# EAGLE board STM32LoRa (EAGLE 9.6.2)
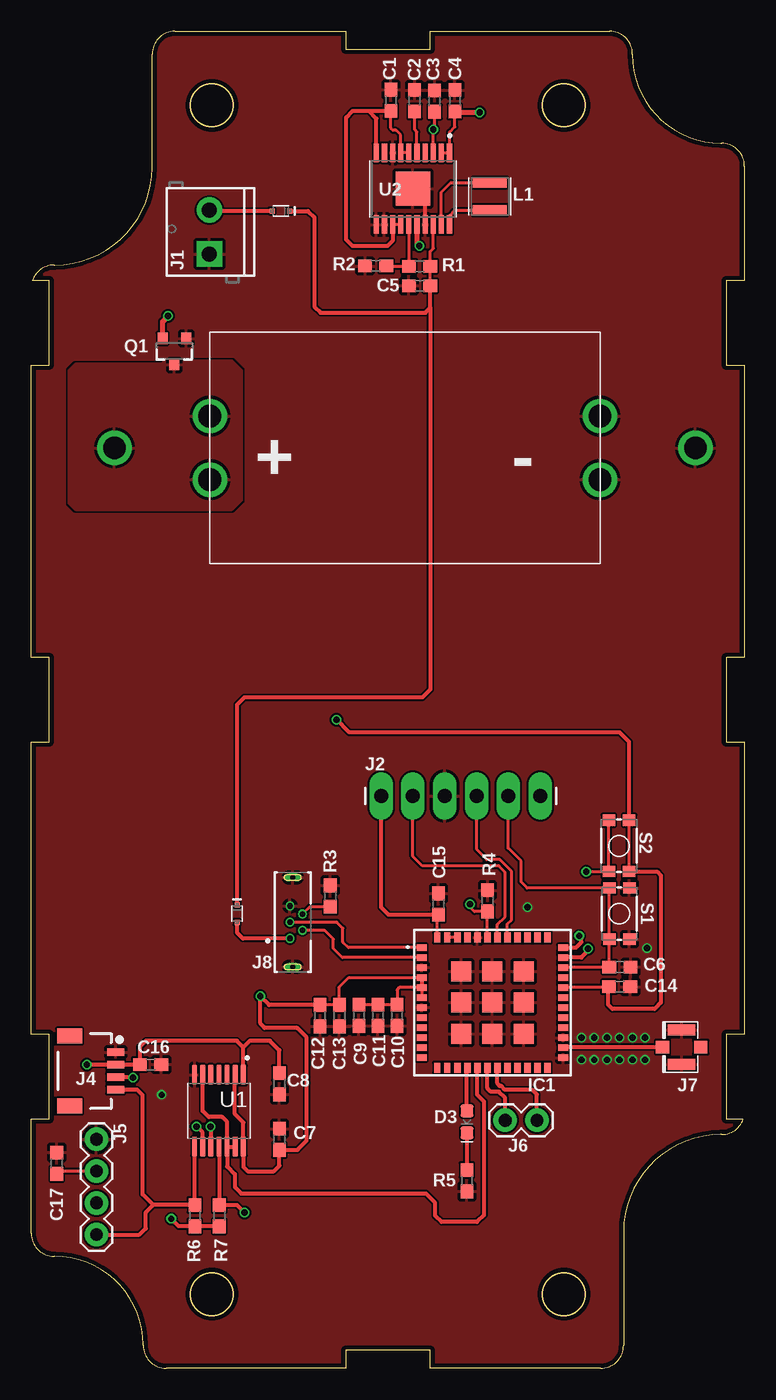
[diagram p0: board, top side]
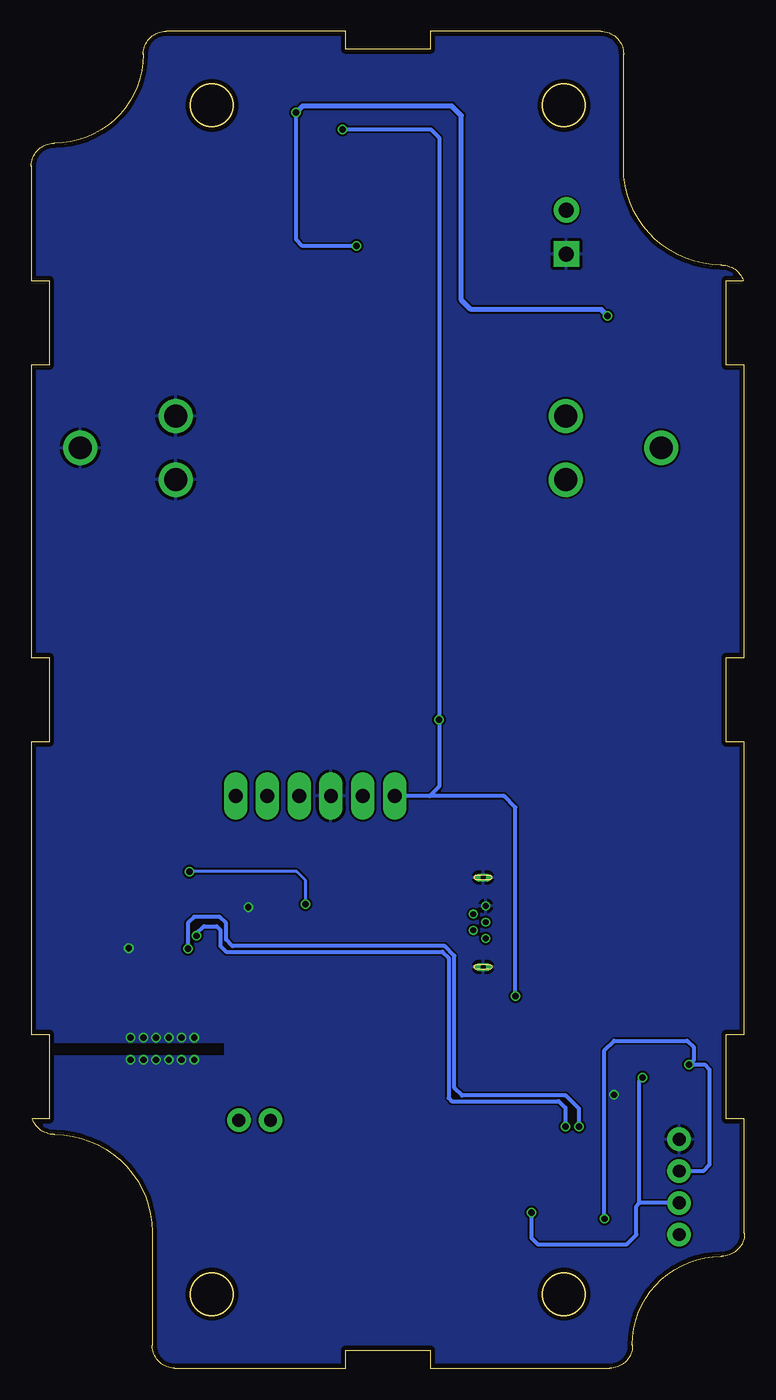
[diagram p1: board, bottom side, seen from below]

Size 56.96 x 106.82 mm. Coordinates in mm from the lower left corner, seen from the top.
Outline: 55.09,97.88 55.14,97.88 arc-90 56.96,96.06 56.96,86.88 55.51,86.88 55.51,80.13 56.96,80.13 56.96,56.78 55.51,56.78 55.51,50.03 56.96,50.03 56.96,26.68 55.51,26.68 55.51,19.93 56.87,19.93 arc-72 55.14,18.67 55.09,18.67 arc90 47.3,10.89 47.3,1.82 arc-90 45.48,0 31.85,0 31.85,1.44 25.1,1.44 25.1,0 10.76,0 arc-90 8.94,1.82 8.94,1.87 arc90 1.87,8.94 1.82,8.94 arc-90 0,10.76 0,19.93 1.44,19.93 1.44,26.68 0,26.68 0,50.03 1.44,50.03 1.44,56.78 0,56.78 0,80.13 1.44,80.13 1.44,86.88 0.09,86.88 arc-72 1.82,88.15 1.87,88.15 arc90 9.65,95.93 9.65,105 arc-90 11.47,106.82 25.1,106.82 25.1,105.37 31.85,105.37 31.85,106.82 46.2,106.82 arc-90 48.02,105 48.02,104.94 arc90 55.09,97.88
Outline: circle at 14.42,100.91 radius 1.71
Outline: circle at 42.54,100.91 radius 1.71
Outline: circle at 42.54,5.91 radius 1.71
Outline: circle at 14.42,5.91 radius 1.71
Copper layers (1*16): Top 0.035559375mm / dielectric 1.6mm / Bottom 0.035559375mm
Design rules "oshpark-2layer": minimum track width 6mil, minimum drill 10mil, track to track 6mil, track to pad 6mil, pad to pad 6mil, via to via 6mil, smd to smd 6mil, copper to edge 15mil, drill to drill 6mil, minimum pad ring 5mil, minimum via ring 5mil, stop-mask expansion 2.5mil, vias tented up to drill 0mil, thermal gap 10mil

## Footprints (pad centres in the part's own frame; a part is rotated, then mirrored left to right if it is on the bottom)
KEYSTONE_V2 = drill 1.829: P$1 15.58,2.54; P$2 15.58,-2.54; P$3 23.2,0; P$4 -15.58,2.54; P$5 -15.58,-2.54; P$6 -23.2,0
0603 = smd 1.1 x 1: 1 -0.85,0; 2 0.85,0
SOD-523 = smd 0.4 x 0.4: A -0.7,0; C 0.7,0
LED-0603 = smd 1 x 1: A -0.877,0; C 0.877,0
CMWX1ZZABZ-078 = smd 0.8 x 0.5: 1 -5.65,4.4; 2 -5.65,3.6; 3 -5.65,2.8; 4 -5.65,2; 5 -5.65,1.2; 6 -5.65,0.4; 7 -5.65,-0.4; 8 -5.65,-1.2; 9 -5.65,-2; 10 -5.65,-2.8; 11 -5.65,-3.6; 12 -5.65,-4.4; 25 5.65,-4.4; 26 5.65,-3.6; 27 5.65,-2.8; 28 5.65,-2; 29 5.65,-1.2; 30 5.65,-0.4; 31 5.65,0.4; 32 5.65,1.2; 33 5.65,2; 34 5.65,2.8; 35 5.65,3.6; 36 5.65,4.4 | smd 0.5 x 0.8: 13 -4.4,-5.2; 14 -3.6,-5.2; 15 -2.8,-5.2; 16 -2,-5.2; 17 -1.2,-5.2; 18 -0.4,-5.2; 19 0.4,-5.2; 20 1.2,-5.2; 21 2,-5.2; 22 2.8,-5.2; 23 3.6,-5.2; 24 4.4,-5.2; 37 4.4,5.2; 38 3.6,5.2; 39 2.8,5.2; 40 2,5.2; 41 1.2,5.2; 42 0.4,5.2; 43 -0.4,5.2; 44 -1.2,5.2; 45 -2,5.2; 46 -2.8,5.2; 47 -3.6,5.2; 48 -4.4,5.2 | smd 1.6 x 1.6: 49 -2.5,2.5; 50 0,2.5; 51 2.5,2.5; 52 -2.5,0; 53 0,0; 54 2.5,0; 55 -2.5,-2.5; 56 0,-2.5; 57 2.5,-2.5
SCREWTERMINAL-3.5MM-2 = drill 1.2 pad 2.032 square: 1 0,0 | drill 1.2 pad 2.032: 2 3.5,0
1X06_LONGPADS = drill 1.118 pad 1.88 long: 1 0,0; 2 2.54,0; 3 5.08,0; 4 7.62,0; 5 10.16,0; 6 12.7,0
1X04_1MM_RA = smd 0.6 x 1.35: 1 -1.5,0; 2 -0.5,0; 3 0.5,0; 4 1.5,0 | smd 1.2 x 2: NC1 2.8,-3.675; NC2 -2.8,-3.675
1X04 = drill 1.016 pad 1.88: 1 0,0; 2 2.54,0; 3 5.08,0; 4 7.62,0
1X02 = drill 1.016 pad 1.88: 1 0,0; 2 2.54,0
U.FL = smd 2.2 x 0.85: 1 0,1.375; 2 0,-1.375 | smd 1.05 x 1: FEED 1.525,0; NC -1.525,0
GCT_USB3131-30-0230-A_REVB = drill 0.45: 1 -1.3,0.22; 2 -0.65,-0.78; 3 0,0.22; 4 0.65,-0.78; 5 1.3,0.22 | drill 0.4 long: S1 -3.575,0; S2 3.575,0
IND_LQH3NPN100MMEL = smd 0.8 x 2.7: 1 -1.1,0; 2 1.1,0
SOT23-3 = smd 0.8 x 0.9: 1 -0.95,-1; 2 0.95,-1; 3 0,1.1
TACTILE_SWITCH_SMD_4.6X2.8MM = smd 0.9 x 1: 1 -2.05,-0.8; 2 2.05,-0.8; 3 2.05,0.8; 4 -2.05,0.8
SOP65P640X120-14N = smd 1.57 x 0.41: 1 -2.87,1.95; 2 -2.87,1.3; 3 -2.87,0.65; 4 -2.87,0; 5 -2.87,-0.65; 6 -2.87,-1.3; 7 -2.87,-1.95; 8 2.87,-1.95; 9 2.87,-1.3; 10 2.87,-0.65; 11 2.87,0; 12 2.87,0.65; 13 2.87,1.3; 14 2.87,1.95
SOP65P640X120-21N = smd 1.48 x 0.41: 1 -2.865,2.925; 2 -2.865,2.275; 3 -2.865,1.625; 4 -2.865,0.975; 5 -2.865,0.325; 6 -2.865,-0.325; 7 -2.865,-0.975; 8 -2.865,-1.625; 9 -2.865,-2.275; 10 -2.865,-2.925; 11 2.865,-2.925; 12 2.865,-2.275; 13 2.865,-1.625; 14 2.865,-0.975; 15 2.865,-0.325; 16 2.865,0.325; 17 2.865,0.975; 18 2.865,1.625; 19 2.865,2.275; 20 2.865,2.925 | smd 2.74 x 2.74: 21 0,0

## Placement (x,y rotation side)
BATT1  KEYSTONE_54KEYSTONE_2  [KEYSTONE_V2]  29.84,73.53 180 top
C1  10nF  [0603]  28.73,101.3 90 top
C2  2.2uF  [0603]  30.61,101.27 90 top
C3  47uF  [0603]  32.21,101.24 90 top
C4  47uF  [0603]  33.83,101.27 270 top
C5  10uF  [0603]  31.01,86.49 180 top
C6  0.1uF  [0603]  47.02,32.05 0 top
C7  0.1uF  [0603]  19.81,18.29 90 top
C8  0.1uF  [0603]  19.81,22.73 90 top
C9  10uF  [0603]  26.16,28.19 270 top
C10  1.0uF  [0603]  29.21,28.19 270 top
C11  0.1uF  [0603]  27.69,28.19 270 top
C12  10uF  [0603]  23.06,28.17 90 top
C13  0.1uF  [0603]  24.61,28.17 270 top
C14  1.0uF  [0603]  46.99,30.48 0 top
C15  0.1uF  [0603]  32.51,37.08 270 top
C16  0.1uF  [0603]  9.53,24.26 180 top
C17  0.1uF  [0603]  2.03,16.38 270 top
D1  120mA/40V/370mV  [SOD-523]  19.94,92.46 0 top
D2  120mA/40V/370mV  [SOD-523]  16.43,36.32 90 top
D3  GREEN  [LED-0603]  34.8,19.68 270 top
IC1  CMWX1ZZABZ-078  [CMWX1ZZABZ-078]  36.83,29.21 0 top
J1  [SCREWTERMINAL-3.5MM-2]  14.22,89.03 90 top
J2  [1X06_LONGPADS]  27.94,45.72 0 top
J4  Qwiic Right Angle  [1X04_1MM_RA]  6.73,23.75 270 top
J5  [1X04]  5.21,18.29 270 top
J6  [1X02]  37.85,19.81 0 top
J7  U.FL  [U.FL]  51.94,25.65 180 top
J8  USB3131-30-0230-A_REVB  [GCT_USB3131-30-0230-A_REVB]  20.88,35.64 90 top
L1  LQH3NPN100MMEL  [IND_LQH3NPN100MMEL]  36.63,93.62 90 top
Q1  2.5A/30V/105mΩ  [SOT23-3]  11.43,81.28 180 top
R1  2.0M  [0603]  31.01,88.04 0 top
R2  365k  [0603]  27.51,88.06 0 top
R3  100k  [0603]  23.88,37.72 270 top
R4  10k  [0603]  36.45,37.34 270 top
R5  100  [0603]  34.8,14.99 270 top
R6  4.7k  [0603]  13.06,12.19 270 top
R7  4.7k  [0603]  15.01,12.19 270 top
S1  MOMENTARY-SWITCH-SPST-SMD-4.6X2.8MM  [TACTILE_SWITCH_SMD_4.6X2.8MM]  46.96,36.32 90 top
S2  MOMENTARY-SWITCH-SPST-SMD-4.6X2.8MM  [TACTILE_SWITCH_SMD_4.6X2.8MM]  46.94,41.73 270 top
U1  TS3A4751PWR  [SOP65P640X120-14N]  14.99,20.57 270 top
U2  LTC3106EFE#PBF  [SOP65P640X120-21N]  30.48,94.23 270 top

## Library data of the parts
BATT1 = battery_54
C1 = SparkFun-Capacitors; PROD_ID: CAP-00867
C2 = SparkFun-Capacitors; PROD_ID: CAP-07888
C3 C4 = SparkFun-Capacitors; PROD_ID: CAP-08280
C5 C9 C12 = SparkFun-Capacitors; PROD_ID: CAP-11015
C6-C8 C11 C13 C15-C17 = SparkFun-Capacitors; PROD_ID: CAP-00810
C10 C14 = SparkFun-Capacitors; PROD_ID: CAP-00868
D1 D2 = SparkFun-DiscreteSemi; PROD_ID: DIO-11018
D3 = SparkFun-LED; PROD_ID: DIO-00821
IC1 = SamacSys_Parts; DESCRIPTION: RF Modules Type ABZ LoRa Module MCU - STM32L082; HEIGHT: mm; MANUFACTURER_NAME: Murata Electronics; MANUFACTURER_PART_NUMBER: CMWX1ZZABZ-078; MOUSER_PART_NUMBER: 81-CMWX1ZZABZ-078; MOUSER_PRICE-STOCK: https://www.mouser.co.uk/ProductDetail/Murata-Electronics/CMWX1ZZABZ-078?qs=POvGejmMzm8lN1bzM2%2FdRQ%3D%3D
J1 = SparkFun-Connectors; PROD_ID: CONN-08399
J2 J5 J6 = SparkFun-Connectors
J4 = SparkFun-Connectors; PROD_ID: CONN-13694
J7 = SparkFun-Connectors; PROD_ID: CONN-09193; SF_ID: WRL-09144
J8 = USB3131-30-0230-A_REVB; AVAILABILITY: Unavailable; DESCRIPTION: USB - micro B USB 2.0 Receptacle Connector 5 Position Through Hole; MF: Global Connector Technology; MP: USB3131-30-0230-A; PACKAGE: None; PRICE: None
L1 = LQH3NPN100MMEL; DESCRIPTION: 10µH Shielded Wirewound Inductor 800mA 228mOhm Max 1212 (3030 Metric); DIGI-KEY_PART_NUMBER: 490-15945-1-ND; DIGIKEY-PURCHASE-URL: https://snapeda.com/shop?store=DigiKey&id=4547508; MF: Murata; MOUSER-PURCHASE-URL: https://snapeda.com/shop?store=Mouser&id=4547508; MP: LQH3NPN100MMEL; PACKAGE: 1212 Murata
Q1 = SparkFun-DiscreteSemi; PROD_ID: TRANS-11308
R1 = SparkFun-Resistors; PROD_ID: RES-10054
R2 = SparkFun-Resistors; PROD_ID: RES-12024
R3 = SparkFun-Resistors; PROD_ID: RES-07828
R4 = SparkFun-Resistors; PROD_ID: RES-00824
R5 = SparkFun-Resistors; PROD_ID: RES-12438
R6 R7 = SparkFun-Resistors; PROD_ID: RES-07857
S1 S2 = SparkFun-Switches; PROD_ID: SWCH-13065
U1 = TS3A4751PWR; ARROW_ELECTRONICS-PURCHASE-URL: https://snapeda.com/shop?store=Arrow+Electronics&id=361966; DESCRIPTION: 0.9-?, 3.3-V, 1:1 (SPST), 4-channel analog switch with 1.8-V input logic 14-TSSOP -40 to 85; DIGI-KEY_PART_NUMBER: 296-20700-1-ND; DIGIKEY-PURCHASE-URL: https://snapeda.com/shop?store=DigiKey&id=361966; MF: Texas Instruments; MOUSER-PURCHASE-URL: https://snapeda.com/shop?store=Mouser&id=361966; MP: TS3A4751PWR; PACKAGE: TSSOP-14 Texas Instruments; TEXAS_INSTRUMENTS-PURCHASE-URL: https://snapeda.com/shop?store=Texas+Instruments&id=361966
U2 = LTC3106EFE_PBF; DESCRIPTION: Conv DC-DC -0.3V to 6V Non-Inv/Inv/Step Up/Step Down Single-Out 1.8V/2.2V/3.3V/5V 0.3A 20-Pin TSSOP; MF: Analog Devices; MOUSER-PURCHASE-URL: https://snapeda.com/shop?store=Mouser&id=4332360; MP: LTC3106EFE#PBF; PACKAGE: TSSOP W/ EP-20 Analog Devices

## Nets
3.3V: C3.1 C7.1 C9.1 C10.1 C11.1 C12.2 C13.1 C14.1 C15.2 IC1.4 IC1.5 IC1.6 IC1.32 IC1.48 J2.1 S2.3 S2.4 U1.2 U1.14 U2.3
!NRST: C6.1 IC1.34 J2.5 S1.3 S1.4
D13: D3.A IC1.16
GND: BATT1.P$4 BATT1.P$5 BATT1.P$6 C1.2 C2.2 C3.2 C4.1 C5.2 C6.2 C7.2 C8.1 C9.2 C10.2 C11.2 C12.1 C13.2 C14.2 C15.1 C16.1 C17.1 IC1.3 IC1.7 IC1.25 IC1.27 IC1.44 IC1.49 IC1.50 IC1.51 IC1.52 IC1.53 IC1.54 IC1.55 IC1.56 IC1.57 J1.1 J2.3 J4.1 J5.1 J7.1 J7.2 J8.5 J8.S1 J8.S2 Q1.1 R2.1 R3.1 R4.1 R5.2 S1.1 S1.2 U1.7 U2.8 U2.11 U2.12 U2.17 U2.21
N$1: L1.1 U2.20
N$2: L1.2 U2.19
N$3: C2.1 U2.5
N$4: BATT1.P$1 BATT1.P$2 BATT1.P$3 Q1.3
N$5: R1.1 R2.2 U2.15
N$6: D1.A J1.2
N$8: IC1.43 R4.2 S2.1 S2.2
N$9: IC1.46 IC1.47
N$10: IC1.26 J7.FEED
N$11: D3.C R5.1
N$12: J8.4 R3.2
N$13: D2.A J8.1
RX: IC1.18 J6.1
SCL_IN: IC1.35 U1.9
SCL_OUT: J4.4 J5.4 R6.1 U1.8
SDA_IN: IC1.36 U1.10
SDA_OUT: J4.3 J5.3 R7.1 U1.11
SWCLK: IC1.42 J2.2
SWDIO: IC1.41 J2.4
SWITCH_EN: IC1.17 U1.6 U1.12 U1.13
TX: IC1.19 J6.2
USB_N: IC1.2 J8.2
USB_P: IC1.1 J8.3
V_BATT: C4.2 Q1.2 U2.1 U2.2 U2.16
VCC: C1.1 U2.6 U2.7 U2.10 U2.13 U2.14
VCC_1: C8.2 C16.2 C17.2 J4.2 J5.2 R6.2 R7.2 U1.1
VIN: C5.1 D1.C D2.C R1.2 U2.18

## Tracks (layer width: path | path; a pad name or v marks a point on that pad's centre or on a via)
3.3V  (via drill 0.51)
  Top 0.254: U2.3 32.1,98.81 | v32.1,98.98 32.21,99.08 C3.1 | IC1.48 32.43,36.15 C15.2 | C14.1 46.07,30.41 IC1.32 | S2.3 S2.4 | C12.2 C13.1 24.61,30.45 25.37,31.21 IC1.4 | IC1.6 IC1.5 29.39,30.41 29.21,30.23 C10.1 C11.1 C9.1
  Top 0.305: 32.1,98.81 v32.1,98.98 | C15.2 28.54,36.23 27.94,36.83 J2.1 | C12.2 18.99,29.02 v18.29,29.72 18.29,27.53 18.64,27.18 21.23,27.18 22,26.42 22,18.19 21.25,17.44 C7.1 19.81,16.18 19.38,15.75 17.27,15.75 16.94,16.08 U1.14 16.94,19.64 16.26,20.32 16.26,23.41 U1.2 | S2.4 47.74,50.05 46.99,50.8 25.4,50.8 v24.38,51.82 | IC1.4 IC1.5 | S2.3 49.98,39.68 50.29,39.37 50.29,29.21 49.78,28.7 46.41,28.7 46.07,29.04 46.07,30.41
  Bottom 0.305: v32.1,98.98 25.07,98.98 24.38,98.3 v24.38,51.82 24.38,46.48 25.15,45.72 | 25.15,45.72 J2.1 | v18.29,29.72 18.29,44.81 19.2,45.72 25.15,45.72
!NRST
  Top 0.254: IC1.34 46.12,32.01 C6.1 S1.4 S1.3 39.61,38.37 39.12,38.86 39.12,40.51 38.08,41.55 38.08,45.7 J2.5
D13
  Top 0.305: D3.A 34.8,23.98 IC1.16
GND  (via drill 0.51)
  Top 0.305: U2.17 31.45,93.26 U2.21
  other vias: 43.94,24.64 44.96,24.64 45.97,24.64 46.99,24.64 48.01,24.64 49.02,24.64 43.94,26.42 44.96,26.42 45.97,26.42 46.99,26.42 48.01,26.42 49.02,26.42 10.41,21.84 39.62,36.83 49.17,33.55
  pour Top (rank 6): 57.15,-0.25 -1.78,-0.25 -1.78,106.68 57.15,106.68
  pour Bottom: -1.78,0 -1.78,106.68 56.9,106.68 57.15,26.11 41.45,26.11 41.45,24.89 57.15,24.89 57.15,-0.25 -1.52,-0.25
N$1
  Top 0.254: U2.20 33.41,92.1 33.83,92.52 L1.1
N$2
  Top 0.254: U2.19 32.76,93.97 33.51,94.72 L1.2
N$3
  Top 0.254: U2.5 30.8,98.76 30.61,98.96 C2.1
N$4
  pour Top: 10.67,80.52 16,80.52 16.76,79.76 16.76,69.34 16,68.58 3.56,68.58 3.05,69.09 3.05,79.76 3.56,80.26 10.41,80.26
N$5
  Top 0.254: R2.2 30.14,88.06 | 30.14,88.06 R1.1 | U2.15 30.16,88.08 30.14,88.06
N$6
  Top 0.254: 14.29,92.46 J1.2
  Top 0.305: D1.A 14.29,92.46
N$8  (via drill 0.51)
  Top 0.254: IC1.43 36.43,36.47 R4.2 35.39,36.49 35.05,36.83 v35.05,37.08 | S2.1 S2.2 44.33,39.68 v44.32,39.67
  Bottom 0.254: v35.05,37.08 35.05,38.96 35.76,39.67 v44.32,39.67
N$9
  Top 0.254: IC1.46 IC1.47
N$10
  Top 0.305: IC1.26 42.52,25.65 J7.FEED
N$11
  Top 0.305: D3.C R5.1
N$12
  Top 0.254: R3.2 22.24,36.87 J8.4
N$13
  Top 0.305: J8.1 16.9,34.34 16.43,34.8 D2.A
RX
  Top 0.305: J6.1 37.85,21.59 37.34,22.1 36.7,22.1 36.42,22.38 IC1.18
SCL_IN  (via drill 0.51)
  Top 0.305: U1.9 13.69,18.83 v13.21,19.3 | v44.45,33.53 44.45,33.33 43.94,32.81 IC1.35
  Bottom 0.305: v13.21,19.3 13.21,20.73 14.28,21.79 22.55,21.79 23.16,22.4 23.16,32.95 23.94,33.73 40.89,33.73 41.4,34.24 41.4,35.56 41.91,36.07 43.94,36.07 44.45,35.56 v44.45,33.53
SCL_OUT
  Top 0.305: U1.8 13.06,17.68 R6.1 9.74,13.04 | J5.4 8.64,10.67 9.14,11.18 9.14,12.45 9.74,13.04 | 9.74,13.04 8.89,13.89 8.89,21.82 8.46,22.25 J4.4
SDA_IN  (via drill 0.51)
  Top 0.305: v14.3,19.3 14.34,19.27 U1.10 | IC1.36 43.52,33.61 43.94,34.04 43.94,34.37 v43.76,34.54
  Bottom 0.305: v14.3,19.3 14.3,20.8 14.83,21.34 23.37,21.34 23.62,21.59 23.62,32.77 24.13,33.27 41.4,33.27 41.86,33.73 41.86,35 42.16,35.31 43.18,35.31 43.76,34.72 v43.76,34.54
SDA_OUT  (via drill 0.51)
  Top 0.305: U1.11 15.01,17.68 R7.1 16.42,13.04 v17.02,12.45 | v8.13,23.22 6.76,23.22 J4.3
  Bottom 0.305: v17.02,12.45 17.02,10.41 16.51,9.91 9.4,9.91 8.64,10.67 8.64,12.95 8.38,13.21 | J5.3 8.38,13.21 | v8.13,23.22 8.38,22.97 8.38,13.21
SWCLK
  Top 0.254: IC1.42 37.23,35.45 37.85,36.07 37.85,39.62 37.34,40.13 31.24,40.13 30.48,40.89 J2.2
SWDIO
  Top 0.254: IC1.41 38.03,35.49 38.35,35.81 38.35,39.69 37.41,40.64 36.37,40.64 35.56,41.45 J2.4
SWITCH_EN
  Top 0.305: U1.12 U1.13 | U1.12 15.64,19.67 15.24,20.07 14.17,20.07 13.69,20.55 U1.6 | U1.12 15.64,16.11 16.26,15.49 16.26,14.48 16.76,13.97 31.5,13.97 32.26,13.21 32.26,12.19 32.77,11.68 35.59,11.68 36.17,12.27 36.17,21.29 35.61,21.84 35.61,23.99 IC1.17
TX
  Top 0.305: J6.2 40.39,21.87 40.01,22.25 37.83,22.25 37.53,22.55 37.41,22.55 37.23,22.74 IC1.19
USB_N
  Top 0.254: IC1.2 24.85,32.81 24.13,33.53 24.13,34.29 23.44,34.98 21.67,34.98 J8.2
USB_P
  Top 0.254: IC1.1 25.32,33.61 24.89,34.04 24.89,35.15 24.41,35.64 J8.3
V_BATT  (via drill 0.51)
  Top 0.254: U2.2 U2.1 33.41,98.76 33.83,99.19 33.83,100.33 C4.2
  Top 0.406: Q1.2 10.48,83.63 v10.92,84.07 | v35.81,100.33 33.83,100.33 | U2.16 30.8,89.84 v30.99,89.66
  Bottom 0.305: v35.81,100.33 35.81,90.17 35.31,89.66 v30.99,89.66
  Bottom 0.406: v10.92,84.07 11.43,84.58 21.84,84.58 22.61,85.34 22.61,100.08 23.37,100.84 35.31,100.84 v35.81,100.33
VCC
  Top 0.254: U2.6 U2.7 29.5,98.54 29.13,98.91 28.91,98.91 28.73,99.08 C1.1 | 27.86,100.46 28.72,100.46 | U2.14 U2.13
  Top 0.305: U2.13 28.86,90.07 28.45,89.66 25.65,89.66 25.15,90.17 25.15,99.92 25.68,100.46 26.95,100.46 | 26.95,100.46 28.72,100.46 C1.1 | U2.10 27.55,99.85 26.95,100.46
VCC_1  (via drill 0.51)
  Top 0.254: J5.2 2.25,15.75 C17.2
  Top 0.305: C8.2 19.81,25.4 19.05,26.16 17.45,26.16 16.94,25.65 | U1.1 16.94,25.65 | 16.94,25.65 16.42,26.16 9.14,26.16 8.68,25.69 C16.2 8.67,24.25 J4.2 6.71,24.27 v4.43,24.27 | R7.2 R6.2 11.77,11.34 v11.18,11.94
  Bottom 0.305: v11.18,11.94 11.18,25.4 10.41,26.16 4.57,26.16 4.06,25.65 4.06,24.61 4.42,24.26 v4.43,24.27 3.19,24.27 2.79,23.88 2.79,16.26 3.3,15.75 J5.2
VIN
  Top 0.254: U2.18 32.11,89.46 31.86,89.22 R1.2 C5.1
  Top 0.305: D1.C 22.1,92.46 22.61,91.95 22.61,84.84 23.11,84.33 31.47,84.33 31.88,84.73 | 31.88,84.73 31.88,86.47 C5.1 | D2.C 16.43,53.01 17.02,53.59 31.24,53.59 31.88,54.23 31.88,84.73